# Altium PCB B车模摄像头.PcbDoc (part 2 of 2)
Units mil, origin at the board's own origin, x right, y up, seen from the top; angles counter-clockwise.
Board outline 3935.06 x 1885.03 mil, 2 copper layers (Top Layer, Bottom Layer); 34 components, 50 nets, 260 pads, 36 vias.
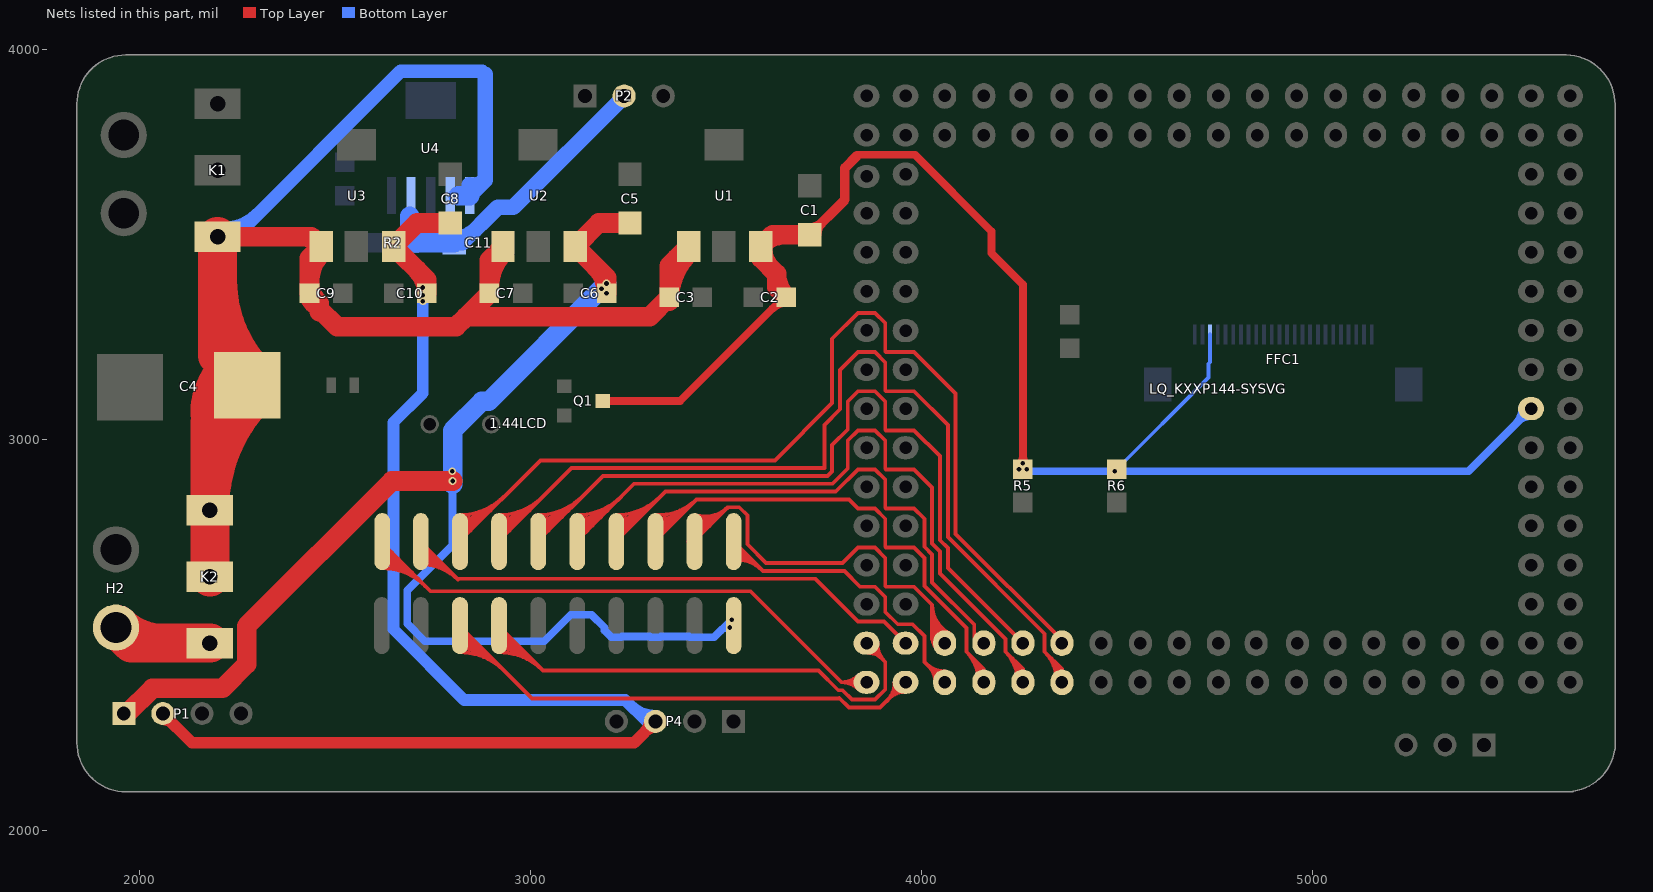
[diagram p2: the nets of this part, all layers, seen from the top]

## Via types
v1: diameter 20, hole 12, Top Layer to Bottom Layer, 32 vias
v2: diameter 118.11, hole 118.11, Top Layer to Bottom Layer, 4 vias

## Nets (pads, with @x,y where several pads share a name; then routed paths per layer and width w, separated by ;. In a path a pad name is that pad's centre, name@x,y a point inside that pad or via, vN(x,y) a via of type N, cw(c..) or ccw(c..) an arc to the next point about the centre after c; other vN are vias at no path point) (continued)
PTD12: 1.44LCD.14 LQ_KXXP144-SYSVG.122 | length 2998
  Top Layer w10: 1.44LCD.14@2920,2525 2920,2522.64 3032.64,2410 3737.5,2410 3787.8,2359.7 3798.58,2359.7 3822.78,2335.5 3881.93,2335.5 3908,2361.57 3908,2432 LQ_KXXP144-SYSVG.122@3860,2480 ; 1.44LCD.14@2920,2457.17 cw(c2920,2299.11) 3031.76,2410.87 ; 1.44LCD.14@2920,2457.17 cw(c2920,2299.11) 3031.76,2410.87 ; 1.44LCD.14@2920,2457.17 cw(c2920,2299.11) 3031.76,2410.87 ; 1.44LCD.14@2920,2467.17 cw(c2920,2333.25) 3014.69,2427.94 ; 1.44LCD.14@2920,2467.17 cw(c2920,2333.25) 3014.69,2427.94 ; 1.44LCD.14@2920,2467.17 cw(c2920,2333.25) 3014.69,2427.94 ; 1.44LCD.14@2920,2477.17 cw(c2920,2367.39) 2997.62,2445.01 ; 1.44LCD.14@2920,2477.17 cw(c2920,2367.39) 2997.62,2445.01 ; 1.44LCD.14@2920,2477.17 cw(c2920,2367.39) 2997.62,2445.01 ; 1.44LCD.14@2920,2487.17 cw(c2920,2401.53) 2980.55,2462.08 ; 1.44LCD.14@2920,2487.17 cw(c2920,2401.53) 2980.55,2462.08 ; 1.44LCD.14@2920,2487.17 cw(c2920,2401.53) 2980.55,2462.08 ; 1.44LCD.14@2920,2497.17 cw(c2920,2435.68) 2963.48,2479.16 ; 1.44LCD.14@2920,2497.17 cw(c2920,2435.68) 2963.48,2479.16 ; 1.44LCD.14@2920,2497.17 cw(c2920,2435.68) 2963.48,2479.16 ; 1.44LCD.14@2920,2507.17 cw(c2920,2469.82) 2946.41,2496.23 ; 1.44LCD.14@2920,2507.17 cw(c2920,2469.82) 2946.41,2496.23 ; 1.44LCD.14@2920,2507.17 cw(c2920,2469.82) 2946.41,2496.23 ; 1.44LCD.14@2920,2517.17 cw(c2920,2503.96) 1.44LCD.14@2929.34,2513.3 ; 1.44LCD.14@2920,2517.17 cw(c2920,2503.96) 1.44LCD.14@2929.34,2513.3 ; 1.44LCD.14@2920,2517.17 cw(c2920,2503.96) 1.44LCD.14@2929.34,2513.3 ; LQ_KXXP144-SYSVG.122@3863.5,2455.5 cw(c3863.5,2404.8) 3899.35,2440.65 ; LQ_KXXP144-SYSVG.122@3863.5,2455.5 cw(c3863.5,2404.8) 3899.35,2440.65 ; LQ_KXXP144-SYSVG.122@3863.5,2455.5 cw(c3863.5,2404.8) 3899.35,2440.65 ; LQ_KXXP144-SYSVG.122@3878,2479.64 ccw(c3918.16,2478.66) 3889.75,2450.25 ; LQ_KXXP144-SYSVG.122@3878,2479.64 ccw(c3918.16,2478.66) 3889.75,2450.25 ; LQ_KXXP144-SYSVG.122@3878,2479.64 ccw(c3918.16,2478.66) 3889.75,2450.25 ; LQ_KXXP144-SYSVG.122@3887.99,2479.4 ccw(c3950.37,2477.87) 3906.25,2433.75 ; LQ_KXXP144-SYSVG.122@3887.99,2479.4 ccw(c3950.37,2477.87) 3906.25,2433.75 ; LQ_KXXP144-SYSVG.122@3887.99,2479.4 ccw(c3950.37,2477.87) 3906.25,2433.75
PTD13: 1.44LCD.2 LQ_KXXP144-SYSVG.121 | length 2389
  Top Layer w10: 1.44LCD.2@2720,2740 2720,2737.64 2812.64,2645 3728.57,2645 3838.07,2535.5 3904.5,2535.5 LQ_KXXP144-SYSVG.121@3960,2480 ; 1.44LCD.2@2720,2682.17 cw(c2720,2548.25) 2814.69,2642.94 ; 1.44LCD.2@2720,2682.17 cw(c2720,2548.25) 2814.69,2642.94 ; 1.44LCD.2@2720,2682.17 cw(c2720,2548.25) 2814.69,2642.94 ; 1.44LCD.2@2720,2692.17 cw(c2720,2582.39) 2797.62,2660.01 ; 1.44LCD.2@2720,2692.17 cw(c2720,2582.39) 2797.62,2660.01 ; 1.44LCD.2@2720,2692.17 cw(c2720,2582.39) 2797.62,2660.01 ; 1.44LCD.2@2720,2702.17 cw(c2720,2616.53) 2780.55,2677.08 ; 1.44LCD.2@2720,2702.17 cw(c2720,2616.53) 2780.55,2677.08 ; 1.44LCD.2@2720,2702.17 cw(c2720,2616.53) 2780.55,2677.08 ; 1.44LCD.2@2720,2712.17 cw(c2720,2650.68) 2763.48,2694.16 ; 1.44LCD.2@2720,2712.17 cw(c2720,2650.68) 2763.48,2694.16 ; 1.44LCD.2@2720,2712.17 cw(c2720,2650.68) 2763.48,2694.16 ; 1.44LCD.2@2720,2722.17 cw(c2720,2684.82) 2746.41,2711.23 ; 1.44LCD.2@2720,2722.17 cw(c2720,2684.82) 2746.41,2711.23 ; 1.44LCD.2@2720,2722.17 cw(c2720,2684.82) 2746.41,2711.23 ; 1.44LCD.2@2720,2732.17 cw(c2720,2718.96) 1.44LCD.2@2729.34,2728.3 ; 1.44LCD.2@2720,2732.17 cw(c2720,2718.96) 1.44LCD.2@2729.34,2728.3 ; 1.44LCD.2@2720,2732.17 cw(c2720,2718.96) 1.44LCD.2@2729.34,2728.3
PTD14: 1.44LCD.1@2621.18,2740 LQ_KXXP144-SYSVG.124 | length 3199
  Top Layer w10: 1.44LCD.1@2621.18,2740 2621.18,2736.45 2744.8,2612.83 3562.95,2612.83 3795.78,2380 LQ_KXXP144-SYSVG.124@3860,2380 ; 1.44LCD.1@2621.18,2672.17 cw(c2621.18,2516.96) 2730.93,2626.71 ; 1.44LCD.1@2621.18,2672.17 cw(c2621.18,2516.96) 2730.93,2626.71 ; 1.44LCD.1@2621.18,2672.17 cw(c2621.18,2516.96) 2730.93,2626.71 ; 1.44LCD.1@2621.18,2682.17 cw(c2621.18,2551.1) 2713.86,2643.78 ; 1.44LCD.1@2621.18,2682.17 cw(c2621.18,2551.1) 2713.86,2643.78 ; 1.44LCD.1@2621.18,2682.17 cw(c2621.18,2551.1) 2713.86,2643.78 ; 1.44LCD.1@2621.18,2692.17 cw(c2621.18,2585.24) 2696.79,2660.85 ; 1.44LCD.1@2621.18,2692.17 cw(c2621.18,2585.24) 2696.79,2660.85 ; 1.44LCD.1@2621.18,2692.17 cw(c2621.18,2585.24) 2696.79,2660.85 ; 1.44LCD.1@2621.18,2702.17 cw(c2621.18,2619.38) 2679.72,2677.92 ; 1.44LCD.1@2621.18,2702.17 cw(c2621.18,2619.38) 2679.72,2677.92 ; 1.44LCD.1@2621.18,2702.17 cw(c2621.18,2619.38) 2679.72,2677.92 ; 1.44LCD.1@2621.18,2712.17 cw(c2621.18,2653.53) 2662.64,2694.99 ; 1.44LCD.1@2621.18,2712.17 cw(c2621.18,2653.53) 2662.64,2694.99 ; 1.44LCD.1@2621.18,2712.17 cw(c2621.18,2653.53) 2662.64,2694.99 ; 1.44LCD.1@2621.18,2722.17 cw(c2621.18,2687.67) 2645.57,2712.06 ; 1.44LCD.1@2621.18,2722.17 cw(c2621.18,2687.67) 2645.57,2712.06 ; 1.44LCD.1@2621.18,2722.17 cw(c2621.18,2687.67) 2645.57,2712.06 ; 1.44LCD.1@2621.18,2732.17 cw(c2621.18,2721.81) 1.44LCD.1@2628.5,2729.13 ; 1.44LCD.1@2621.18,2732.17 cw(c2621.18,2721.81) 1.44LCD.1@2628.5,2729.13 ; 1.44LCD.1@2621.18,2732.17 cw(c2621.18,2721.81) 1.44LCD.1@2628.5,2729.13 ; 3797.35,2380 cw(c3797.35,2320.85) LQ_KXXP144-SYSVG.124@3839.18,2362.68 ; 3797.35,2380 ccw(c3797.35,2439.15) LQ_KXXP144-SYSVG.124@3839.18,2397.32 ; 3797.35,2380 cw(c3797.35,2320.85) LQ_KXXP144-SYSVG.124@3839.18,2362.68 ; 3797.35,2380 ccw(c3797.35,2439.15) LQ_KXXP144-SYSVG.124@3839.18,2397.32 ; 3797.35,2380 cw(c3797.35,2320.85) LQ_KXXP144-SYSVG.124@3839.18,2362.68 ; 3797.35,2380 ccw(c3797.35,2439.15) LQ_KXXP144-SYSVG.124@3839.18,2397.32 ; 3821.49,2380 cw(c3821.49,2344.99) LQ_KXXP144-SYSVG.124@3846.25,2369.75 ; 3821.49,2380 ccw(c3821.49,2415.01) LQ_KXXP144-SYSVG.124@3846.25,2390.25 ; 3821.49,2380 cw(c3821.49,2344.99) LQ_KXXP144-SYSVG.124@3846.25,2369.75 ; 3821.49,2380 ccw(c3821.49,2415.01) LQ_KXXP144-SYSVG.124@3846.25,2390.25 ; 3821.49,2380 cw(c3821.49,2344.99) LQ_KXXP144-SYSVG.124@3846.25,2369.75 ; 3821.49,2380 ccw(c3821.49,2415.01) LQ_KXXP144-SYSVG.124@3846.25,2390.25
PTD15: 1.44LCD.13 LQ_KXXP144-SYSVG.123 | length 3049.5
  Top Layer w10: 1.44LCD.13@2820,2525 2820,2522.64 3003.82,2338.82 3789.41,2338.82 3790.3,2339.7 3815,2315 3895,2315 LQ_KXXP144-SYSVG.123@3960,2380 ; 1.44LCD.13@2820,2457.17 cw(c2820,2299.11) 2931.76,2410.87 ; 1.44LCD.13@2820,2457.17 cw(c2820,2299.11) 2931.76,2410.87 ; 1.44LCD.13@2820,2457.17 cw(c2820,2299.11) 2931.76,2410.87 ; 1.44LCD.13@2820,2467.17 cw(c2820,2333.25) 2914.69,2427.94 ; 1.44LCD.13@2820,2467.17 cw(c2820,2333.25) 2914.69,2427.94 ; 1.44LCD.13@2820,2467.17 cw(c2820,2333.25) 2914.69,2427.94 ; 1.44LCD.13@2820,2477.17 cw(c2820,2367.39) 2897.62,2445.01 ; 1.44LCD.13@2820,2477.17 cw(c2820,2367.39) 2897.62,2445.01 ; 1.44LCD.13@2820,2477.17 cw(c2820,2367.39) 2897.62,2445.01 ; 1.44LCD.13@2820,2487.17 cw(c2820,2401.53) 2880.55,2462.08 ; 1.44LCD.13@2820,2487.17 cw(c2820,2401.53) 2880.55,2462.08 ; 1.44LCD.13@2820,2487.17 cw(c2820,2401.53) 2880.55,2462.08 ; 1.44LCD.13@2820,2497.17 cw(c2820,2435.68) 2863.48,2479.16 ; 1.44LCD.13@2820,2497.17 cw(c2820,2435.68) 2863.48,2479.16 ; 1.44LCD.13@2820,2497.17 cw(c2820,2435.68) 2863.48,2479.16 ; 1.44LCD.13@2820,2507.17 cw(c2820,2469.82) 2846.41,2496.23 ; 1.44LCD.13@2820,2507.17 cw(c2820,2469.82) 2846.41,2496.23 ; 1.44LCD.13@2820,2507.17 cw(c2820,2469.82) 2846.41,2496.23 ; 1.44LCD.13@2820,2517.17 cw(c2820,2503.96) 1.44LCD.13@2829.34,2513.3 ; 1.44LCD.13@2820,2517.17 cw(c2820,2503.96) 1.44LCD.13@2829.34,2513.3 ; 1.44LCD.13@2820,2517.17 cw(c2820,2503.96) 1.44LCD.13@2829.34,2513.3 ; 3912.2,2332.2 ccw(c3864.4,2380) LQ_KXXP144-SYSVG.123@3932,2380 ; 3912.2,2332.2 ccw(c3864.4,2380) LQ_KXXP144-SYSVG.123@3932,2380 ; 3912.2,2332.2 ccw(c3864.4,2380) LQ_KXXP144-SYSVG.123@3932,2380 ; 3920.65,2340.65 cw(c3956.5,2304.8) LQ_KXXP144-SYSVG.123@3956.5,2355.5 ; 3920.65,2340.65 cw(c3956.5,2304.8) LQ_KXXP144-SYSVG.123@3956.5,2355.5 ; 3920.65,2340.65 cw(c3956.5,2304.8) LQ_KXXP144-SYSVG.123@3956.5,2355.5 ; 3929.27,2349.27 ccw(c3898.54,2380) LQ_KXXP144-SYSVG.123@3942,2380 ; 3929.27,2349.27 ccw(c3898.54,2380) LQ_KXXP144-SYSVG.123@3942,2380 ; 3929.27,2349.27 ccw(c3898.54,2380) LQ_KXXP144-SYSVG.123@3942,2380
PTE0: 1.44LCD.10 LQ_KXXP144-SYSVG.1 | length 1936.5
  Top Layer w10: 1.44LCD.10@3520,2740 3595,2665 3803.28,2665 3843.78,2624.5 3881.93,2624.5 3908,2598.43 3908,2560.28 3939.86,2528.43 3978.01,2528.43 4008,2498.43 4008,2432 LQ_KXXP144-SYSVG.1@4060,2380 ; 1.44LCD.10@3512.77,2741.69 cw(c3514.08,2731.77) 1.44LCD.10@3521.16,2738.84 ; 1.44LCD.10@3512.77,2741.69 cw(c3514.08,2731.77) 1.44LCD.10@3521.16,2738.84 ; 1.44LCD.10@3512.77,2741.69 cw(c3514.08,2731.77) 1.44LCD.10@3521.16,2738.84 ; 1.44LCD.10@3514.08,2731.77 cw(c3517.44,2706.5) 1.44LCD.10@3535.47,2724.53 ; 1.44LCD.10@3514.08,2731.77 cw(c3517.44,2706.5) 1.44LCD.10@3535.47,2724.53 ; 1.44LCD.10@3514.08,2731.77 cw(c3517.44,2706.5) 1.44LCD.10@3535.47,2724.53 ; 1.44LCD.10@3515.4,2721.86 cw(c3520.8,2681.22) 3549.79,2710.21 ; 1.44LCD.10@3515.4,2721.86 cw(c3520.8,2681.22) 3549.79,2710.21 ; 1.44LCD.10@3515.4,2721.86 cw(c3520.8,2681.22) 3549.79,2710.21 ; 1.44LCD.10@3516.72,2711.95 cw(c3524.16,2655.95) 3564.11,2695.89 ; 1.44LCD.10@3516.72,2711.95 cw(c3524.16,2655.95) 3564.11,2695.89 ; 1.44LCD.10@3516.72,2711.95 cw(c3524.16,2655.95) 3564.11,2695.89 ; 1.44LCD.10@3518.03,2702.04 cw(c3527.52,2630.67) 3578.42,2681.58 ; 1.44LCD.10@3518.03,2702.04 cw(c3527.52,2630.67) 3578.42,2681.58 ; 1.44LCD.10@3518.03,2702.04 cw(c3527.52,2630.67) 3578.42,2681.58 ; 1.44LCD.10@3519.35,2692.12 cw(c3530.88,2605.4) 3592.74,2667.26 ; 1.44LCD.10@3519.35,2692.12 cw(c3530.88,2605.4) 3592.74,2667.26 ; 1.44LCD.10@3519.35,2692.12 cw(c3530.88,2605.4) 3592.74,2667.26 ; 4012.2,2427.8 ccw(c4060,2475.6) LQ_KXXP144-SYSVG.1@4060,2408 ; 4012.2,2427.8 ccw(c4060,2475.6) LQ_KXXP144-SYSVG.1@4060,2408 ; 4012.2,2427.8 ccw(c4060,2475.6) LQ_KXXP144-SYSVG.1@4060,2408 ; 4020.65,2419.35 cw(c3984.8,2383.5) LQ_KXXP144-SYSVG.1@4035.5,2383.5 ; 4020.65,2419.35 cw(c3984.8,2383.5) LQ_KXXP144-SYSVG.1@4035.5,2383.5 ; 4020.65,2419.35 cw(c3984.8,2383.5) LQ_KXXP144-SYSVG.1@4035.5,2383.5 ; 4029.27,2410.73 ccw(c4060,2441.46) LQ_KXXP144-SYSVG.1@4060,2398 ; 4029.27,2410.73 ccw(c4060,2441.46) LQ_KXXP144-SYSVG.1@4060,2398 ; 4029.27,2410.73 ccw(c4060,2441.46) LQ_KXXP144-SYSVG.1@4060,2398
PTE1: 1.44LCD.9 LQ_KXXP144-SYSVG.2 | length 3452.3
  Top Layer w10: 1.44LCD.9@3420,2740 3420,2742.36 3505.47,2827.83 ; LQ_KXXP144-SYSVG.2@4060,2480 4038.15,2480 4028,2490.15 4028,2578.43 ; 1.44LCD.9@3404.4,2740.1 ccw(c3409.52,2757.38) 1.44LCD.9@3422.27,2744.63 ; 1.44LCD.9@3404.4,2740.1 ccw(c3409.52,2757.38) 1.44LCD.9@3422.27,2744.63 ; 1.44LCD.9@3404.4,2740.1 ccw(c3409.52,2757.38) 1.44LCD.9@3422.27,2744.63 ; 1.44LCD.9@3407.24,2749.68 ccw(c3414.95,2775.72) 1.44LCD.9@3434.15,2756.52 ; 1.44LCD.9@3407.24,2749.68 ccw(c3414.95,2775.72) 1.44LCD.9@3434.15,2756.52 ; 1.44LCD.9@3407.24,2749.68 ccw(c3414.95,2775.72) 1.44LCD.9@3434.15,2756.52 ; 1.44LCD.9@3410.08,2759.27 ccw(c3420.39,2794.06) 3446.04,2768.4 ; 1.44LCD.9@3410.08,2759.27 ccw(c3420.39,2794.06) 3446.04,2768.4 ; 1.44LCD.9@3410.08,2759.27 ccw(c3420.39,2794.06) 3446.04,2768.4 ; 1.44LCD.9@3412.92,2768.86 ccw(c3425.82,2812.4) 3457.93,2780.29 ; 1.44LCD.9@3412.92,2768.86 ccw(c3425.82,2812.4) 3457.93,2780.29 ; 1.44LCD.9@3412.92,2768.86 ccw(c3425.82,2812.4) 3457.93,2780.29 ; 1.44LCD.9@3415.76,2778.45 ccw(c3431.25,2830.74) 3469.81,2792.18 ; 1.44LCD.9@3415.76,2778.45 ccw(c3431.25,2830.74) 3469.81,2792.18 ; 1.44LCD.9@3415.76,2778.45 ccw(c3431.25,2830.74) 3469.81,2792.18 ; 1.44LCD.9@3418.6,2788.04 ccw(c3436.68,2849.08) 3481.7,2804.06 ; 1.44LCD.9@3418.6,2788.04 ccw(c3436.68,2849.08) 3481.7,2804.06 ; 1.44LCD.9@3418.6,2788.04 ccw(c3436.68,2849.08) 3481.7,2804.06 ; 1.44LCD.9@3421.44,2797.63 ccw(c3442.11,2867.41) 3493.58,2815.95 ; 1.44LCD.9@3421.44,2797.63 ccw(c3442.11,2867.41) 3493.58,2815.95 ; 1.44LCD.9@3421.44,2797.63 ccw(c3442.11,2867.41) 3493.58,2815.95 ; 1.44LCD.9@3424.28,2807.21 ccw(c3447.55,2885.75) 3505.47,2827.83 ; 1.44LCD.9@3424.28,2807.21 ccw(c3447.55,2885.75) 3505.47,2827.83 ; 1.44LCD.9@3424.28,2807.21 ccw(c3447.55,2885.75) 3505.47,2827.83 ; 3505.47,2827.83 3534.53,2827.83 3555.08,2807.29 3555.08,2733.21 3603.28,2685 3798.57,2685 3838.07,2724.5 3881.93,2724.5 3908,2698.43 3908,2626.72 3910.22,2624.5 3981.93,2624.5 4028,2578.43 ; 4028,2494.42 ccw(c4065.92,2494.42) LQ_KXXP144-SYSVG.2@4047.84,2461.09 ; 4028,2494.42 ccw(c4065.92,2494.42) LQ_KXXP144-SYSVG.2@4047.84,2461.09 ; 4028,2494.42 ccw(c4065.92,2494.42) LQ_KXXP144-SYSVG.2@4047.84,2461.09 ; 4028,2511.22 ccw(c4075.04,2511.22) LQ_KXXP144-SYSVG.2@4052.61,2469.88 ; 4028,2511.22 ccw(c4075.04,2511.22) LQ_KXXP144-SYSVG.2@4052.61,2469.88 ; 4028,2511.22 ccw(c4075.04,2511.22) LQ_KXXP144-SYSVG.2@4052.61,2469.88 ; 4028,2528.02 ccw(c4084.15,2528.02) LQ_KXXP144-SYSVG.2@4057.38,2478.67 ; 4028,2528.02 ccw(c4084.15,2528.02) LQ_KXXP144-SYSVG.2@4057.38,2478.67 ; 4028,2528.02 ccw(c4084.15,2528.02) LQ_KXXP144-SYSVG.2@4057.38,2478.67 ; 4028,2544.83 ccw(c4093.27,2544.83) LQ_KXXP144-SYSVG.2@4062.15,2487.46 ; 4028,2544.83 ccw(c4093.27,2544.83) LQ_KXXP144-SYSVG.2@4062.15,2487.46 ; 4028,2544.83 ccw(c4093.27,2544.83) LQ_KXXP144-SYSVG.2@4062.15,2487.46 ; 4028,2561.63 ccw(c4102.38,2561.63) LQ_KXXP144-SYSVG.2@4066.91,2496.25 ; 4028,2561.63 ccw(c4102.38,2561.63) LQ_KXXP144-SYSVG.2@4066.91,2496.25 ; 4028,2561.63 ccw(c4102.38,2561.63) LQ_KXXP144-SYSVG.2@4066.91,2496.25 ; 4028,2578.43 ccw(c4111.5,2578.43) LQ_KXXP144-SYSVG.2@4071.68,2505.04 ; 4028,2578.43 ccw(c4111.5,2578.43) LQ_KXXP144-SYSVG.2@4071.68,2505.04 ; 4028,2578.43 ccw(c4111.5,2578.43) LQ_KXXP144-SYSVG.2@4071.68,2505.04
PTE2: 1.44LCD.8 LQ_KXXP144-SYSVG.3 | length 3146.8
  Top Layer w10: 1.44LCD.8@3320,2740 3320,2742.36 3425.47,2847.83 ; LQ_KXXP144-SYSVG.3@4160,2380 4160,2413.57 4115.5,2458.07 4115.5,2519.22 4008,2626.72 4008,2698.43 3981.93,2724.5 3910.22,2724.5 3908,2726.72 3908,2798.43 3881.93,2824.5 3838.07,2824.5 3814.73,2847.83 3765,2847.83 3425.47,2847.83 ; 1.44LCD.8@3317.54,2747.9 ccw(c3318.47,2764.88) 1.44LCD.8@3330.49,2752.86 ; 1.44LCD.8@3317.54,2747.9 ccw(c3318.47,2764.88) 1.44LCD.8@3330.49,2752.86 ; 1.44LCD.8@3317.54,2747.9 ccw(c3318.47,2764.88) 1.44LCD.8@3330.49,2752.86 ; 1.44LCD.8@3318.09,2757.89 ccw(c3320.12,2794.89) 3346.32,2768.69 ; 1.44LCD.8@3318.09,2757.89 ccw(c3320.12,2794.89) 3346.32,2768.69 ; 1.44LCD.8@3318.09,2757.89 ccw(c3320.12,2794.89) 3346.32,2768.69 ; 1.44LCD.8@3318.63,2767.87 ccw(c3321.76,2824.9) 3362.15,2784.51 ; 1.44LCD.8@3318.63,2767.87 ccw(c3321.76,2824.9) 3362.15,2784.51 ; 1.44LCD.8@3318.63,2767.87 ccw(c3321.76,2824.9) 3362.15,2784.51 ; 1.44LCD.8@3319.18,2777.86 ccw(c3323.41,2854.91) 3377.98,2800.34 ; 1.44LCD.8@3319.18,2777.86 ccw(c3323.41,2854.91) 3377.98,2800.34 ; 1.44LCD.8@3319.18,2777.86 ccw(c3323.41,2854.91) 3377.98,2800.34 ; 1.44LCD.8@3319.73,2787.84 ccw(c3325.06,2884.92) 3393.81,2816.17 ; 1.44LCD.8@3319.73,2787.84 ccw(c3325.06,2884.92) 3393.81,2816.17 ; 1.44LCD.8@3319.73,2787.84 ccw(c3325.06,2884.92) 3393.81,2816.17 ; 1.44LCD.8@3320.28,2797.83 ccw(c3326.71,2914.93) 3409.64,2832 ; 1.44LCD.8@3320.28,2797.83 ccw(c3326.71,2914.93) 3409.64,2832 ; 1.44LCD.8@3320.28,2797.83 ccw(c3326.71,2914.93) 3409.64,2832 ; 1.44LCD.8@3320.83,2807.81 ccw(c3328.36,2944.94) 3425.46,2847.83 ; 1.44LCD.8@3320.83,2807.81 ccw(c3328.36,2944.94) 3425.46,2847.83 ; 1.44LCD.8@3320.83,2807.81 ccw(c3328.36,2944.94) 3425.46,2847.83 ; 4116.76,2456.8 cw(c4047.24,2387.28) LQ_KXXP144-SYSVG.3@4145.51,2383.99 ; 4116.76,2456.8 cw(c4047.24,2387.28) LQ_KXXP144-SYSVG.3@4145.51,2383.99 ; 4116.76,2456.8 cw(c4047.24,2387.28) LQ_KXXP144-SYSVG.3@4145.51,2383.99 ; 4133.06,2440.51 cw(c4078.77,2386.22) LQ_KXXP144-SYSVG.3@4155.5,2383.65 ; 4133.06,2440.51 cw(c4078.77,2386.22) LQ_KXXP144-SYSVG.3@4155.5,2383.65 ; 4133.06,2440.51 cw(c4078.77,2386.22) LQ_KXXP144-SYSVG.3@4155.5,2383.65 ; 4149.35,2424.21 cw(c4110.3,2385.16) LQ_KXXP144-SYSVG.3@4165.5,2383.32 ; 4149.35,2424.21 cw(c4110.3,2385.16) LQ_KXXP144-SYSVG.3@4165.5,2383.32 ; 4149.35,2424.21 cw(c4110.3,2385.16) LQ_KXXP144-SYSVG.3@4165.5,2383.32
PTE3: 1.44LCD.7 LQ_KXXP144-SYSVG.4 | length 2759.6
  Top Layer w10: 1.44LCD.7@3220,2740 3220,2742.36 3345.47,2867.83 3781.4,2867.83 3838.07,2924.5 3881.93,2924.5 3908,2898.43 3908,2826.72 3910.22,2824.5 3981.93,2824.5 4008,2798.43 4008,2726.72 4028,2706.72 4028,2635 4135.5,2527.5 4135.5,2494.5 4150,2480 LQ_KXXP144-SYSVG.4@4160,2480 ; 1.44LCD.7@3220,2747.83 ccw(c3220,2761.04) 1.44LCD.7@3229.34,2751.7 ; 1.44LCD.7@3220,2747.83 ccw(c3220,2761.04) 1.44LCD.7@3229.34,2751.7 ; 1.44LCD.7@3220,2747.83 ccw(c3220,2761.04) 1.44LCD.7@3229.34,2751.7 ; 1.44LCD.7@3220,2757.83 ccw(c3220,2795.18) 3246.41,2768.77 ; 1.44LCD.7@3220,2757.83 ccw(c3220,2795.18) 3246.41,2768.77 ; 1.44LCD.7@3220,2757.83 ccw(c3220,2795.18) 3246.41,2768.77 ; 1.44LCD.7@3220,2767.83 ccw(c3220,2829.32) 3263.48,2785.84 ; 1.44LCD.7@3220,2767.83 ccw(c3220,2829.32) 3263.48,2785.84 ; 1.44LCD.7@3220,2767.83 ccw(c3220,2829.32) 3263.48,2785.84 ; 1.44LCD.7@3220,2777.83 ccw(c3220,2863.47) 3280.55,2802.92 ; 1.44LCD.7@3220,2777.83 ccw(c3220,2863.47) 3280.55,2802.92 ; 1.44LCD.7@3220,2777.83 ccw(c3220,2863.47) 3280.55,2802.92 ; 1.44LCD.7@3220,2787.83 ccw(c3220,2897.61) 3297.62,2819.99 ; 1.44LCD.7@3220,2787.83 ccw(c3220,2897.61) 3297.62,2819.99 ; 1.44LCD.7@3220,2787.83 ccw(c3220,2897.61) 3297.62,2819.99 ; 1.44LCD.7@3220,2797.83 ccw(c3220,2931.75) 3314.69,2837.06 ; 1.44LCD.7@3220,2797.83 ccw(c3220,2931.75) 3314.69,2837.06 ; 1.44LCD.7@3220,2797.83 ccw(c3220,2931.75) 3314.69,2837.06 ; 1.44LCD.7@3220,2807.83 ccw(c3220,2965.89) 3331.76,2854.13 ; 1.44LCD.7@3220,2807.83 ccw(c3220,2965.89) 3331.76,2854.13 ; 1.44LCD.7@3220,2807.83 ccw(c3220,2965.89) 3331.76,2854.13
PTE4: 1.44LCD.6 LQ_KXXP144-SYSVG.5 | length 3744.5
  Top Layer w10: 1.44LCD.6@3120,2740 3120,2742.36 3265.47,2887.83 3773.12,2887.83 3812,2926.72 3812,2998.43 3838.07,3024.5 3881.93,3024.5 3908,2998.43 3908,2926.72 3910.22,2924.5 3981.93,2924.5 4028,2878.43 4028,2735 4048,2715 4048,2658.43 4215.5,2490.93 4215.5,2458.07 4260,2413.57 LQ_KXXP144-SYSVG.5@4260,2380 ; 1.44LCD.6@3120,2747.83 ccw(c3120,2761.04) 1.44LCD.6@3129.34,2751.7 ; 1.44LCD.6@3120,2747.83 ccw(c3120,2761.04) 1.44LCD.6@3129.34,2751.7 ; 1.44LCD.6@3120,2747.83 ccw(c3120,2761.04) 1.44LCD.6@3129.34,2751.7 ; 1.44LCD.6@3120,2757.83 ccw(c3120,2795.18) 3146.41,2768.77 ; 1.44LCD.6@3120,2757.83 ccw(c3120,2795.18) 3146.41,2768.77 ; 1.44LCD.6@3120,2757.83 ccw(c3120,2795.18) 3146.41,2768.77 ; 1.44LCD.6@3120,2767.83 ccw(c3120,2829.32) 3163.48,2785.84 ; 1.44LCD.6@3120,2767.83 ccw(c3120,2829.32) 3163.48,2785.84 ; 1.44LCD.6@3120,2767.83 ccw(c3120,2829.32) 3163.48,2785.84 ; 1.44LCD.6@3120,2777.83 ccw(c3120,2863.47) 3180.55,2802.92 ; 1.44LCD.6@3120,2777.83 ccw(c3120,2863.47) 3180.55,2802.92 ; 1.44LCD.6@3120,2777.83 ccw(c3120,2863.47) 3180.55,2802.92 ; 1.44LCD.6@3120,2787.83 ccw(c3120,2897.61) 3197.62,2819.99 ; 1.44LCD.6@3120,2787.83 ccw(c3120,2897.61) 3197.62,2819.99 ; 1.44LCD.6@3120,2787.83 ccw(c3120,2897.61) 3197.62,2819.99 ; 1.44LCD.6@3120,2797.83 ccw(c3120,2931.75) 3214.69,2837.06 ; 1.44LCD.6@3120,2797.83 ccw(c3120,2931.75) 3214.69,2837.06 ; 1.44LCD.6@3120,2797.83 ccw(c3120,2931.75) 3214.69,2837.06 ; 1.44LCD.6@3120,2807.83 ccw(c3120,2965.89) 3231.76,2854.13 ; 1.44LCD.6@3120,2807.83 ccw(c3120,2965.89) 3231.76,2854.13 ; 1.44LCD.6@3120,2807.83 ccw(c3120,2965.89) 3231.76,2854.13 ; 4216.76,2456.8 cw(c4147.24,2387.28) LQ_KXXP144-SYSVG.5@4245.51,2383.99 ; 4216.76,2456.8 cw(c4147.24,2387.28) LQ_KXXP144-SYSVG.5@4245.51,2383.99 ; 4216.76,2456.8 cw(c4147.24,2387.28) LQ_KXXP144-SYSVG.5@4245.51,2383.99 ; 4233.06,2440.51 cw(c4178.77,2386.22) LQ_KXXP144-SYSVG.5@4255.5,2383.65 ; 4233.06,2440.51 cw(c4178.77,2386.22) LQ_KXXP144-SYSVG.5@4255.5,2383.65 ; 4233.06,2440.51 cw(c4178.77,2386.22) LQ_KXXP144-SYSVG.5@4255.5,2383.65 ; 4249.35,2424.21 cw(c4210.3,2385.16) LQ_KXXP144-SYSVG.5@4265.5,2383.32 ; 4249.35,2424.21 cw(c4210.3,2385.16) LQ_KXXP144-SYSVG.5@4265.5,2383.32 ; 4249.35,2424.21 cw(c4210.3,2385.16) LQ_KXXP144-SYSVG.5@4265.5,2383.32
PTE5: 1.44LCD.5 LQ_KXXP144-SYSVG.6 | length 3359.4
  Top Layer w10: 1.44LCD.5@3020,2740 3020,2742.36 3185.47,2907.83 3760.28,2907.83 3772,2919.55 3772,2986.72 3812,3026.72 3812,3098.43 3838.07,3124.5 3881.93,3124.5 3908,3098.43 3908,3026.72 3910.22,3024.5 3981.93,3024.5 4048,2958.43 4048,2743.29 4068,2723.29 4068,2672 LQ_KXXP144-SYSVG.6@4260,2480 ; 1.44LCD.5@3020,2747.83 ccw(c3020,2761.04) 1.44LCD.5@3029.34,2751.7 ; 1.44LCD.5@3020,2747.83 ccw(c3020,2761.04) 1.44LCD.5@3029.34,2751.7 ; 1.44LCD.5@3020,2747.83 ccw(c3020,2761.04) 1.44LCD.5@3029.34,2751.7 ; 1.44LCD.5@3020,2757.83 ccw(c3020,2795.18) 3046.41,2768.77 ; 1.44LCD.5@3020,2757.83 ccw(c3020,2795.18) 3046.41,2768.77 ; 1.44LCD.5@3020,2757.83 ccw(c3020,2795.18) 3046.41,2768.77 ; 1.44LCD.5@3020,2767.83 ccw(c3020,2829.32) 3063.48,2785.84 ; 1.44LCD.5@3020,2767.83 ccw(c3020,2829.32) 3063.48,2785.84 ; 1.44LCD.5@3020,2767.83 ccw(c3020,2829.32) 3063.48,2785.84 ; 1.44LCD.5@3020,2777.83 ccw(c3020,2863.47) 3080.55,2802.92 ; 1.44LCD.5@3020,2777.83 ccw(c3020,2863.47) 3080.55,2802.92 ; 1.44LCD.5@3020,2777.83 ccw(c3020,2863.47) 3080.55,2802.92 ; 1.44LCD.5@3020,2787.83 ccw(c3020,2897.61) 3097.62,2819.99 ; 1.44LCD.5@3020,2787.83 ccw(c3020,2897.61) 3097.62,2819.99 ; 1.44LCD.5@3020,2787.83 ccw(c3020,2897.61) 3097.62,2819.99 ; 1.44LCD.5@3020,2797.83 ccw(c3020,2931.75) 3114.69,2837.06 ; 1.44LCD.5@3020,2797.83 ccw(c3020,2931.75) 3114.69,2837.06 ; 1.44LCD.5@3020,2797.83 ccw(c3020,2931.75) 3114.69,2837.06 ; 1.44LCD.5@3020,2807.83 ccw(c3020,2965.89) 3131.76,2854.13 ; 1.44LCD.5@3020,2807.83 ccw(c3020,2965.89) 3131.76,2854.13 ; 1.44LCD.5@3020,2807.83 ccw(c3020,2965.89) 3131.76,2854.13
PTE6: 1.44LCD.4 LQ_KXXP144-SYSVG.7 | length 4350.1
  Top Layer w10: 1.44LCD.4@2920,2740 2920,2742.36 3105.47,2927.83 3752,2927.83 3752,3038.43 3792,3078.43 3792,3178.43 3838.07,3224.5 3881.93,3224.5 3908,3198.43 3908,3126.72 3910.22,3124.5 3981.93,3124.5 4068,3038.43 4068,2751.57 4315.5,2504.07 4315.5,2458.07 4360,2413.57 LQ_KXXP144-SYSVG.7@4360,2380 ; 1.44LCD.4@2920,2747.83 ccw(c2920,2761.04) 1.44LCD.4@2929.34,2751.7 ; 1.44LCD.4@2920,2747.83 ccw(c2920,2761.04) 1.44LCD.4@2929.34,2751.7 ; 1.44LCD.4@2920,2747.83 ccw(c2920,2761.04) 1.44LCD.4@2929.34,2751.7 ; 1.44LCD.4@2920,2757.83 ccw(c2920,2795.18) 2946.41,2768.77 ; 1.44LCD.4@2920,2757.83 ccw(c2920,2795.18) 2946.41,2768.77 ; 1.44LCD.4@2920,2757.83 ccw(c2920,2795.18) 2946.41,2768.77 ; 1.44LCD.4@2920,2767.83 ccw(c2920,2829.32) 2963.48,2785.84 ; 1.44LCD.4@2920,2767.83 ccw(c2920,2829.32) 2963.48,2785.84 ; 1.44LCD.4@2920,2767.83 ccw(c2920,2829.32) 2963.48,2785.84 ; 1.44LCD.4@2920,2777.83 ccw(c2920,2863.47) 2980.55,2802.92 ; 1.44LCD.4@2920,2777.83 ccw(c2920,2863.47) 2980.55,2802.92 ; 1.44LCD.4@2920,2777.83 ccw(c2920,2863.47) 2980.55,2802.92 ; 1.44LCD.4@2920,2787.83 ccw(c2920,2897.61) 2997.62,2819.99 ; 1.44LCD.4@2920,2787.83 ccw(c2920,2897.61) 2997.62,2819.99 ; 1.44LCD.4@2920,2787.83 ccw(c2920,2897.61) 2997.62,2819.99 ; 1.44LCD.4@2920,2797.83 ccw(c2920,2931.75) 3014.69,2837.06 ; 1.44LCD.4@2920,2797.83 ccw(c2920,2931.75) 3014.69,2837.06 ; 1.44LCD.4@2920,2797.83 ccw(c2920,2931.75) 3014.69,2837.06 ; 1.44LCD.4@2920,2807.83 ccw(c2920,2965.89) 3031.76,2854.13 ; 1.44LCD.4@2920,2807.83 ccw(c2920,2965.89) 3031.76,2854.13 ; 1.44LCD.4@2920,2807.83 ccw(c2920,2965.89) 3031.76,2854.13 ; 4316.76,2456.8 cw(c4247.24,2387.28) LQ_KXXP144-SYSVG.7@4345.51,2383.99 ; 4316.76,2456.8 cw(c4247.24,2387.28) LQ_KXXP144-SYSVG.7@4345.51,2383.99 ; 4316.76,2456.8 cw(c4247.24,2387.28) LQ_KXXP144-SYSVG.7@4345.51,2383.99 ; 4333.06,2440.51 cw(c4278.77,2386.22) LQ_KXXP144-SYSVG.7@4355.5,2383.65 ; 4333.06,2440.51 cw(c4278.77,2386.22) LQ_KXXP144-SYSVG.7@4355.5,2383.65 ; 4333.06,2440.51 cw(c4278.77,2386.22) LQ_KXXP144-SYSVG.7@4355.5,2383.65 ; 4349.35,2424.21 cw(c4310.3,2385.16) LQ_KXXP144-SYSVG.7@4365.5,2383.32 ; 4349.35,2424.21 cw(c4310.3,2385.16) LQ_KXXP144-SYSVG.7@4365.5,2383.32 ; 4349.35,2424.21 cw(c4310.3,2385.16) LQ_KXXP144-SYSVG.7@4365.5,2383.32
PTE7: 1.44LCD.3 LQ_KXXP144-SYSVG.8 | length 3899.4
  Top Layer w10: 1.44LCD.3@2820,2740 2820,2742.36 3025.47,2947.83 3625.73,2947.83 3772,3094.1 3772,3258.83 3838.07,3324.89 3881.93,3324.89 3908,3298.83 3908,3226.72 3910.22,3224.5 3981.93,3224.5 4088,3118.43 4088,2759.85 4360,2487.85 LQ_KXXP144-SYSVG.8@4360,2480 ; 1.44LCD.3@2820,2747.83 ccw(c2820,2761.04) 1.44LCD.3@2829.34,2751.7 ; 1.44LCD.3@2820,2747.83 ccw(c2820,2761.04) 1.44LCD.3@2829.34,2751.7 ; 1.44LCD.3@2820,2747.83 ccw(c2820,2761.04) 1.44LCD.3@2829.34,2751.7 ; 1.44LCD.3@2820,2757.83 ccw(c2820,2795.18) 2846.41,2768.77 ; 1.44LCD.3@2820,2757.83 ccw(c2820,2795.18) 2846.41,2768.77 ; 1.44LCD.3@2820,2757.83 ccw(c2820,2795.18) 2846.41,2768.77 ; 1.44LCD.3@2820,2767.83 ccw(c2820,2829.32) 2863.48,2785.84 ; 1.44LCD.3@2820,2767.83 ccw(c2820,2829.32) 2863.48,2785.84 ; 1.44LCD.3@2820,2767.83 ccw(c2820,2829.32) 2863.48,2785.84 ; 1.44LCD.3@2820,2777.83 ccw(c2820,2863.47) 2880.55,2802.92 ; 1.44LCD.3@2820,2777.83 ccw(c2820,2863.47) 2880.55,2802.92 ; 1.44LCD.3@2820,2777.83 ccw(c2820,2863.47) 2880.55,2802.92 ; 1.44LCD.3@2820,2787.83 ccw(c2820,2897.61) 2897.62,2819.99 ; 1.44LCD.3@2820,2787.83 ccw(c2820,2897.61) 2897.62,2819.99 ; 1.44LCD.3@2820,2787.83 ccw(c2820,2897.61) 2897.62,2819.99 ; 1.44LCD.3@2820,2797.83 ccw(c2820,2931.75) 2914.69,2837.06 ; 1.44LCD.3@2820,2797.83 ccw(c2820,2931.75) 2914.69,2837.06 ; 1.44LCD.3@2820,2797.83 ccw(c2820,2931.75) 2914.69,2837.06 ; 1.44LCD.3@2820,2807.83 ccw(c2820,2965.89) 2931.76,2854.13 ; 1.44LCD.3@2820,2807.83 ccw(c2820,2965.89) 2931.76,2854.13 ; 1.44LCD.3@2820,2807.83 ccw(c2820,2965.89) 2931.76,2854.13
V3.3: C1.1 C2.1 FFC1.22 LQ_KXXP144-SYSVG.45 Q1.1 R5.2 R6.2 U1.3 | length 5647
  Top Layer w20: Q1.1@3185,3100 3383.28,3100 3648.28,3365 C2.1@3655,3365 ; 3834.96,3726.09 3838.37,3729.5 3984,3729.5 4179.5,3534 4179.5,3478.07 4260,3397.57 4260,3260 v1(4260,2940) ; Q1.1@3191.44,3094.54 cw(c3204.61,3081.37) 3204.61,3100 ; Q1.1@3191.44,3094.54 cw(c3204.61,3081.37) 3204.61,3100 ; Q1.1@3191.44,3094.54 cw(c3204.61,3081.37) 3204.61,3100 ; Q1.1@3191.44,3105.46 ccw(c3204.61,3118.63) 3204.61,3100 ; Q1.1@3191.44,3105.46 ccw(c3204.61,3118.63) 3204.61,3100 ; Q1.1@3191.44,3105.46 ccw(c3204.61,3118.63) 3204.61,3100 ; 3617.93,3334.64 cw(c3655,3297.57) C2.1@3655,3350 ; 3617.93,3334.64 cw(c3655,3297.57) C2.1@3655,3350 ; 3617.93,3334.64 cw(c3655,3297.57) C2.1@3655,3350 ; C2.1@3634.14,3350.86 ccw(c3620,3365) C2.1@3640,3365 ; C2.1@3634.14,3350.86 ccw(c3620,3365) C2.1@3640,3365 ; C2.1@3634.14,3350.86 ccw(c3620,3365) C2.1@3640,3365 ; R5.2@4249.39,2935.61 ccw(c4223.79,2961.21) 4260,2961.21 ; R5.2@4249.39,2935.61 ccw(c4223.79,2961.21) 4260,2961.21 ; R5.2@4249.39,2935.61 ccw(c4223.79,2961.21) 4260,2961.21 ; 4260,2961.21 ccw(c4296.21,2961.21) R5.2@4270.61,2935.61 ; 4260,2961.21 ccw(c4296.21,2961.21) R5.2@4270.61,2935.61 ; 4260,2961.21 ccw(c4296.21,2961.21) R5.2@4270.61,2935.61
  Top Layer w25: C1.1@3715,3525 3804.5,3614.5 3804.5,3695.63 3834.96,3726.09 ; C1.1@3715,3542.5 ccw(c3715,3584.75) C1.1@3744.87,3554.87 ; C1.1@3715,3542.5 ccw(c3715,3584.75) C1.1@3744.87,3554.87 ; C1.1@3715,3542.5 ccw(c3715,3584.75) C1.1@3744.87,3554.87 ; C1.1@3732.5,3525 cw(c3774.75,3525) C1.1@3744.87,3554.87 ; C1.1@3732.5,3525 cw(c3774.75,3525) C1.1@3744.87,3554.87 ; C1.1@3732.5,3525 cw(c3774.75,3525) C1.1@3744.87,3554.87
  Top Layer w50: C1.1@3715,3525 3620,3525 U1.3@3590,3495 3590,3465 3630,3425 ; U1.3@3593.54,3501.46 cw(c3650.36,3444.64) 3650.36,3525 ; U1.3@3593.54,3501.46 cw(c3650.36,3444.64) 3650.36,3525 ; U1.3@3593.54,3501.46 cw(c3650.36,3444.64) 3650.36,3525 ; U1.3@3595,3485 ccw(c3655.36,3485) 3612.68,3442.32 ; U1.3@3595,3485 ccw(c3655.36,3485) 3612.68,3442.32 ; U1.3@3595,3485 ccw(c3655.36,3485) 3612.68,3442.32 ; 3630,3425 ccw(c3714.49,3425) C2.1@3655,3365 ; 3630,3425 ccw(c3714.49,3425) C2.1@3655,3365 ; 3630,3425 ccw(c3714.49,3425) C2.1@3655,3365 ; 3630,3425 3630,3390 C2.1@3655,3365
  Bottom Layer w10: v1(4495,2920) 4735,3160 4735,3195 4738.99,3198.99 FFC1.22@4738.99,3269.98
  Bottom Layer w20: v1(4270,2925) 4270,2930 v1(4260,2940) 4250,2930 v1(4250,2925) 4255,2920 v1(4495,2920) 4510.02,2920 4515,2920 5400,2920 LQ_KXXP144-SYSVG.45@5560,3080 ; v1@4248.59,2923.59 ccw(c4257.24,2932.24) v1@4257.24,2920 ; v1@4248.59,2923.59 ccw(c4257.24,2932.24) v1@4257.24,2920 ; v1@4248.59,2923.59 ccw(c4257.24,2932.24) v1@4257.24,2920 ; v1@4250,2921.97 cw(c4276.31,2921.97) v1@4258.66,2941.48 ; v1@4250,2921.97 cw(c4276.31,2921.97) v1@4258.66,2941.48 ; v1@4250,2921.97 cw(c4276.31,2921.97) v1@4258.66,2941.48 ; v1@4261.34,2941.48 cw(c4243.69,2921.97) v1@4270,2921.97 ; v1@4261.34,2941.48 cw(c4243.69,2921.97) v1@4270,2921.97 ; v1@4261.34,2941.48 cw(c4243.69,2921.97) v1@4270,2921.97 ; v1@4262.76,2920 ccw(c4262.76,2932.24) v1@4271.41,2923.59 ; v1@4262.76,2920 ccw(c4262.76,2932.24) v1@4271.41,2923.59 ; v1@4262.76,2920 ccw(c4262.76,2932.24) v1@4271.41,2923.59 ; v1@4268.59,2923.59 ccw(c4277.24,2932.24) v1@4277.24,2920 ; v1@4268.59,2923.59 ccw(c4277.24,2932.24) v1@4277.24,2920 ; v1@4268.59,2923.59 ccw(c4277.24,2932.24) v1@4277.24,2920 ; 5520.74,3040.74 ccw(c5481.47,3080) LQ_KXXP144-SYSVG.45@5537,3080 ; 5520.74,3040.74 ccw(c5481.47,3080) LQ_KXXP144-SYSVG.45@5537,3080 ; 5520.74,3040.74 ccw(c5481.47,3080) LQ_KXXP144-SYSVG.45@5537,3080 ; 5529.19,3049.19 cw(c5556.5,3021.87) LQ_KXXP144-SYSVG.45@5556.5,3060.5 ; 5529.19,3049.19 cw(c5556.5,3021.87) LQ_KXXP144-SYSVG.45@5556.5,3060.5 ; 5529.19,3049.19 cw(c5556.5,3021.87) LQ_KXXP144-SYSVG.45@5556.5,3060.5
V3.3_1: 1.44LCD.20 C5.1 C6.1 P1.1 U2.3 | length 3858
  Top Layer w50: P1.1@1960,2300 1968.74,2300 2033.27,2364.53 2212.45,2364.53 2274.06,2426.13 2274.06,2523.52 2645.53,2895 v1(2801.14,2895) ; C5.1@3255,3555 3175,3555 U2.3@3115,3495 3195,3415 v1(3195,3400) v1(3195,3375) ; 3166.72,3443.28 cw(c3098.43,3375) v1(3195,3375) ; 3166.72,3443.28 cw(c3098.43,3375) v1(3195,3375) ; 3166.72,3443.28 cw(c3098.43,3375) v1(3195,3375)
  Bottom Layer w20: v1(2801.14,2895) 2801.14,2731.14 2685,2615 2685,2530.21 2730.21,2485 3035.71,2485 3103.71,2553 3156.64,2553 3190,2519.64 3190,2512.57 3207.57,2495 3232.43,2495 3234.43,2497 3305.57,2497 3307.57,2495 3332.43,2495 3334.43,2497 3405.57,2497 3407.57,2495 3470,2495 v1(3515,2540) ; 3487.81,2512.81 cw(c3510,2490.62) v1@3510,2522 ; 3487.81,2512.81 cw(c3510,2490.62) v1@3510,2522 ; 3487.81,2512.81 cw(c3510,2490.62) v1@3510,2522 ; v1@3508.01,2519.76 cw(c3532.29,2522.71) v1(3515,2540) ; v1@3508.01,2519.76 cw(c3532.29,2522.71) v1(3515,2540) ; v1@3508.01,2519.76 cw(c3532.29,2522.71) v1(3515,2540)
  Bottom Layer w50: v1@2801.14,2886.14 v1(2801.14,2895) 2801.14,3024.05 2875.72,3098.62 2893.62,3098.62 v1(3182.15,3387.15) v1(3195,3400)
  other v1: 3510,2520 2800,2920
V5.0: C8.1 C10.1 P1.2 P4.3 U3.3 | length 4054
  Top Layer w30: P1.2@2060,2300 2134.53,2225.47 3265.47,2225.47 P4.3@3320,2280 ; P1.2@2060,2285.47 cw(c2060,2250.4) 2084.8,2275.2 ; P1.2@2060,2285.47 cw(c2060,2250.4) 2084.8,2275.2 ; P1.2@2060,2285.47 cw(c2060,2250.4) 2084.8,2275.2 ; P1.2@2074.53,2300 ccw(c2109.6,2300) 2084.8,2275.2 ; P1.2@2074.53,2300 ccw(c2109.6,2300) 2084.8,2275.2 ; P1.2@2074.53,2300 ccw(c2109.6,2300) 2084.8,2275.2 ; 3295.2,2255.2 cw(c3320,2230.4) P4.3@3320,2265.47 ; 3295.2,2255.2 ccw(c3270.4,2280) P4.3@3305.47,2280 ; 3295.2,2255.2 cw(c3320,2230.4) P4.3@3320,2265.47 ; 3295.2,2255.2 ccw(c3270.4,2280) P4.3@3305.47,2280 ; 3295.2,2255.2 cw(c3320,2230.4) P4.3@3320,2265.47 ; 3295.2,2255.2 ccw(c3270.4,2280) P4.3@3305.47,2280
  Top Layer w50: C8.1@2795,3555 2710,3555 U3.3@2650,3495 2735,3410 C10.1@2735,3375 ; 2710.25,3434.75 cw(c2650.5,3375) C10.1@2735,3375 ; 2710.25,3434.75 cw(c2650.5,3375) C10.1@2735,3375 ; 2710.25,3434.75 cw(c2650.5,3375) C10.1@2735,3375
  Bottom Layer w30: v1(2725,3390) 2725,3119.72 2650,3044.72 2650,2515.71 2831.18,2334.53 3242.59,2334.53 3297.11,2280 P4.3@3320,2280 ; 3256.13,2320.98 ccw(c3320,2384.85) P4.3@3320,2294.53 ; 3256.13,2320.98 ccw(c3320,2384.85) P4.3@3320,2294.53 ; 3256.13,2320.98 ccw(c3320,2384.85) P4.3@3320,2294.53
  other v1: 2725,3355 2725,3370
V_BAT: C3.1 C4.1 C7.1 C9.1 K1.3 K2.1 K2.2 U1.1 U2.1 U3.1 U4.1 U4.2 | length 8890.1
  Top Layer w50: K1.3@2200,3520 2440,3520 U3.1@2465,3495 2435,3465 C9.1@2435,3375 ; U2.1@2930,3495 2895,3460 C7.1@2895,3375 2835,3315 ; U1.1@3405,3495 3355,3445 C3.1@3355,3365 3305,3315 2835,3315 ; 2416.72,3520 cw(c2416.72,3456.72) U3.1@2461.46,3501.46 ; 2416.72,3520 cw(c2416.72,3456.72) U3.1@2461.46,3501.46 ; 2416.72,3520 cw(c2416.72,3456.72) U3.1@2461.46,3501.46 ; C9.1@2435,3375 ccw(c2470,3375) C9.1@2445.25,3350.25 ; C9.1@2435,3375 ccw(c2470,3375) C9.1@2445.25,3350.25 ; C9.1@2435,3375 cw(c2403.8,3328.26) 2460,3328.26 ; C9.1@2435,3375 ccw(c2470,3375) C9.1@2445.25,3350.25 ; C9.1@2435,3375 ccw(c2470,3375) C9.1@2445.25,3350.25 ; C9.1@2435,3375 cw(c2403.8,3328.26) 2460,3328.26 ; C9.1@2435,3375 ccw(c2470,3375) C9.1@2445.25,3350.25 ; C9.1@2435,3375 ccw(c2470,3375) C9.1@2445.25,3350.25 ; C9.1@2435,3375 cw(c2403.8,3328.26) 2460,3328.26 ; C9.1@2435,3375 2460,3350 2460,3335.5 2505.5,3290 2810,3290 2835,3315 ; 2435,3400.5 cw(c2549.5,3400.5) U3.1@2468.54,3481.46 ; 2435,3400.5 cw(c2549.5,3400.5) U3.1@2468.54,3481.46 ; 2435,3400.5 cw(c2549.5,3400.5) U3.1@2468.54,3481.46 ; C7.1@2895,3388.43 cw(c3026.57,3388.43) U2.1@2933.54,3481.46 ; C7.1@2895,3388.43 cw(c3026.57,3388.43) U2.1@2933.54,3481.46 ; C7.1@2895,3388.43 cw(c3026.57,3388.43) U2.1@2933.54,3481.46 ; 2895,3441.99 cw(c2933.12,3441.99) U2.1@2930.36,3480.01 ; 2895,3441.99 cw(c2933.12,3441.99) U2.1@2930.36,3480.01 ; 2895,3441.99 cw(c2933.12,3441.99) U2.1@2930.36,3480.01 ; C3.1@3355,3355.01 cw(c3531.12,3355.01) U1.1@3408.48,3481.41 ; C3.1@3355,3355.01 cw(c3531.12,3355.01) U1.1@3408.48,3481.41 ; C3.1@3355,3355.01 cw(c3531.12,3355.01) U1.1@3408.48,3481.41 ; 3355,3420.97 cw(c3414.77,3420.97) U1.1@3405.75,3480.06 ; 3355,3420.97 cw(c3414.77,3420.97) U1.1@3405.75,3480.06 ; 3355,3420.97 cw(c3414.77,3420.97) U1.1@3405.75,3480.06
  Top Layer w100: K2.2@2180,2650 K2.1@2180,2820 2180,3044 C4.1@2276,3140 2200,3216 K1.3@2200,3520 ; K2.1@2180,2824.59 cw(c2591.41,2824.59) C4.1@2300.5,3115.5 ; K2.1@2180,2824.59 cw(c2591.41,2824.59) C4.1@2300.5,3115.5 ; K2.1@2180,2824.59 cw(c2591.41,2824.59) C4.1@2300.5,3115.5 ; 2180,3004.24 cw(c2281.22,3004.24) C4.1@2277.33,3105.38 ; 2180,3004.24 cw(c2281.22,3004.24) C4.1@2277.33,3105.38 ; 2180,3004.24 cw(c2281.22,3004.24) C4.1@2277.33,3105.38 ; 2180,3066.01 cw(c2349.99,3066.01) C4.1@2229.79,3186.21 ; 2180,3066.01 cw(c2349.99,3066.01) C4.1@2229.79,3186.21 ; 2180,3066.01 cw(c2349.99,3066.01) C4.1@2229.79,3186.21 ; 2200,3407.12 ccw(c2543.12,3407.12) C4.1@2300.5,3164.5 ; 2200,3407.12 ccw(c2543.12,3407.12) C4.1@2300.5,3164.5 ; 2200,3407.12 ccw(c2543.12,3407.12) C4.1@2300.5,3164.5
  Bottom Layer w35: K1.3@2200,3520 2245,3520 2668.09,3943.09 2876.91,3943.09 2885,3935 ; K1.3@2219.68,3541.87 ccw(c2219.68,3655.78) 2300.23,3575.24 ; K1.3@2219.68,3541.87 ccw(c2219.68,3655.78) 2300.23,3575.24 ; K1.3@2219.68,3541.87 ccw(c2219.68,3655.78) 2300.23,3575.24
  Bottom Layer w40: U4.1@2845,3625 2885,3665 ; 2885,3935 2885,3665 ; U4.1@2843.39,3652.4 ccw(c2852.43,3697.57) 2885,3665 ; U4.1@2843.39,3652.4 ccw(c2852.43,3697.57) 2885,3665 ; U4.1@2843.39,3652.4 ccw(c2852.43,3697.57) 2885,3665
  Bottom Layer w50: 2815,3625 U4.1@2845,3625
V_MOT: H2.1 K2.3 | length 629.9
  Top Layer w100: H2.1@1940,2520 1980,2480 K2.3@2180,2480 ; H2.1@1946.4,2526.4 ccw(c2058.43,2638.43) 2058.43,2480 ; H2.1@1946.4,2526.4 ccw(c2058.43,2638.43) 2058.43,2480 ; H2.1@1946.4,2526.4 ccw(c2058.43,2638.43) 2058.43,2480
VCC-5.5V: C11.1 P2.2 R2.2 U4.4 | length 952.8
  Bottom Layer w40: C11.1@2805,3505 2826.48,3505 2916.48,3595 2956.48,3595 3240,3878.52 P2.2@3240,3880 ; C11.1@2805,3515 ccw(c2805,3591) 2858.74,3537.26 ; C11.1@2805,3515 ccw(c2805,3591) 2858.74,3537.26 ; C11.1@2805,3515 ccw(c2805,3591) 2858.74,3537.26
  Bottom Layer w50: 2691.81,3571.81 2691.81,3506.81 R2.2@2690,3505 C11.1@2805,3505
pads on no net: 1.44LCD.0 1.44LCD.1@2400.01,3928.4 1.44LCD.1@2400.18,3927.84 1.44LCD.1@2419.7,3948.08 1.44LCD.1@2419.86,3947.52 1.44LCD.1@2599.61,2790.89 FFC1.0 FFC1.1 FFC1.2 FFC1.3 FFC1.5 FFC1.7 FFC1.8 FFC1.10 FFC1.23 FFC1.24 LQ_KXXP144-SYSVG.9 LQ_KXXP144-SYSVG.10 LQ_KXXP144-SYSVG.11 LQ_KXXP144-SYSVG.12 LQ_KXXP144-SYSVG.13 LQ_KXXP144-SYSVG.14 LQ_KXXP144-SYSVG.15 LQ_KXXP144-SYSVG.16 LQ_KXXP144-SYSVG.17 LQ_KXXP144-SYSVG.18 LQ_KXXP144-SYSVG.19 LQ_KXXP144-SYSVG.20 LQ_KXXP144-SYSVG.21 LQ_KXXP144-SYSVG.22 LQ_KXXP144-SYSVG.23 LQ_KXXP144-SYSVG.24 LQ_KXXP144-SYSVG.25 LQ_KXXP144-SYSVG.26 LQ_KXXP144-SYSVG.27 LQ_KXXP144-SYSVG.28 LQ_KXXP144-SYSVG.29 LQ_KXXP144-SYSVG.30 LQ_KXXP144-SYSVG.31 LQ_KXXP144-SYSVG.32 LQ_KXXP144-SYSVG.33 LQ_KXXP144-SYSVG.34 LQ_KXXP144-SYSVG.35 LQ_KXXP144-SYSVG.36 LQ_KXXP144-SYSVG.37 LQ_KXXP144-SYSVG.38 LQ_KXXP144-SYSVG.39 LQ_KXXP144-SYSVG.40 LQ_KXXP144-SYSVG.41 LQ_KXXP144-SYSVG.42 LQ_KXXP144-SYSVG.44 LQ_KXXP144-SYSVG.46 LQ_KXXP144-SYSVG.47 LQ_KXXP144-SYSVG.48 LQ_KXXP144-SYSVG.49 LQ_KXXP144-SYSVG.52 LQ_KXXP144-SYSVG.55 LQ_KXXP144-SYSVG.56 LQ_KXXP144-SYSVG.57 LQ_KXXP144-SYSVG.58 LQ_KXXP144-SYSVG.59 LQ_KXXP144-SYSVG.60 LQ_KXXP144-SYSVG.61 LQ_KXXP144-SYSVG.62 LQ_KXXP144-SYSVG.63 LQ_KXXP144-SYSVG.64 LQ_KXXP144-SYSVG.66 LQ_KXXP144-SYSVG.77 LQ_KXXP144-SYSVG.78 LQ_KXXP144-SYSVG.81 LQ_KXXP144-SYSVG.82 LQ_KXXP144-SYSVG.83 LQ_KXXP144-SYSVG.84 LQ_KXXP144-SYSVG.85 LQ_KXXP144-SYSVG.86 LQ_KXXP144-SYSVG.87 LQ_KXXP144-SYSVG.88 LQ_KXXP144-SYSVG.90 LQ_KXXP144-SYSVG.91 LQ_KXXP144-SYSVG.92 LQ_KXXP144-SYSVG.93 LQ_KXXP144-SYSVG.94 LQ_KXXP144-SYSVG.95 LQ_KXXP144-SYSVG.96 LQ_KXXP144-SYSVG.98 LQ_KXXP144-SYSVG.103 LQ_KXXP144-SYSVG.104 LQ_KXXP144-SYSVG.105 LQ_KXXP144-SYSVG.106 LQ_KXXP144-SYSVG.107 LQ_KXXP144-SYSVG.108 LQ_KXXP144-SYSVG.109 LQ_KXXP144-SYSVG.110 LQ_KXXP144-SYSVG.111 LQ_KXXP144-SYSVG.112 LQ_KXXP144-SYSVG.114 LQ_KXXP144-SYSVG.115 LQ_KXXP144-SYSVG.116 LQ_KXXP144-SYSVG.117 LQ_KXXP144-SYSVG.118 LQ_KXXP144-SYSVG.120
copper on no net:
  other v2: 2445,2425 5370,2675 4430,3605 2460,3875

## Keep-outs
Keep-Out Layer:
  lines w10: 5650,2105 ccw(c5650,2225) 5770,2225 ; 5665,2105 1965,2105 cw(c1965,2225) 1845,2225 1845,3860 cw(c1965,3860) 1965,3980 5650,3980 cw(c5647.5,3857.5) 5770,3855 5770,2210

## Silkscreen, mask and mechanical layers (free items; w line width, h text height)
Top Overlay:
  text "+" at 1915,3855 h60
  text "G" at 3325,3775 h60
  text "A8" at 3105,3770 h60
  text "-" at 1875,3520 h60
  text "电机接口" at 5515,2210 h60
  text "gnd" at 2135,2200 h60
  text "gnd" at 2225,2200 h60
  text "编码器" at 3660,2200 h60 r90
  text "v5.0" at 2015,2195 h60
  text "v3.3" at 1900,2190 h60
  text "A10" at 3395,2170 h60
  text "A11" at 3505,2170 h60
  text "V5.0" at 3270,2165 h60
  text "GND" at 3140,2160 h60
  text "GND" at 5190,2120 h60
  text "A7" at 5310,2120 h60
  text "D5" at 5420,2120 h60

## Text inside footprints (layer, text, board x,y; h text height)
LS1: Top Overlay "-" at 2753.15,3107.72 h60 r180; Top Overlay "+" at 2914.17,3113.23 h60 r180